# Altium PCB PCB1.PcbDoc
Units mil, origin at the board's own origin, x right, y up, seen from the top; angles counter-clockwise.
Board outline 5000 x 4000 mil, 2 copper layers (Top Layer, Bottom Layer); 43 components, 24 nets, 163 pads, 0 vias.
Unrouted connection lines stored in the file: 78.
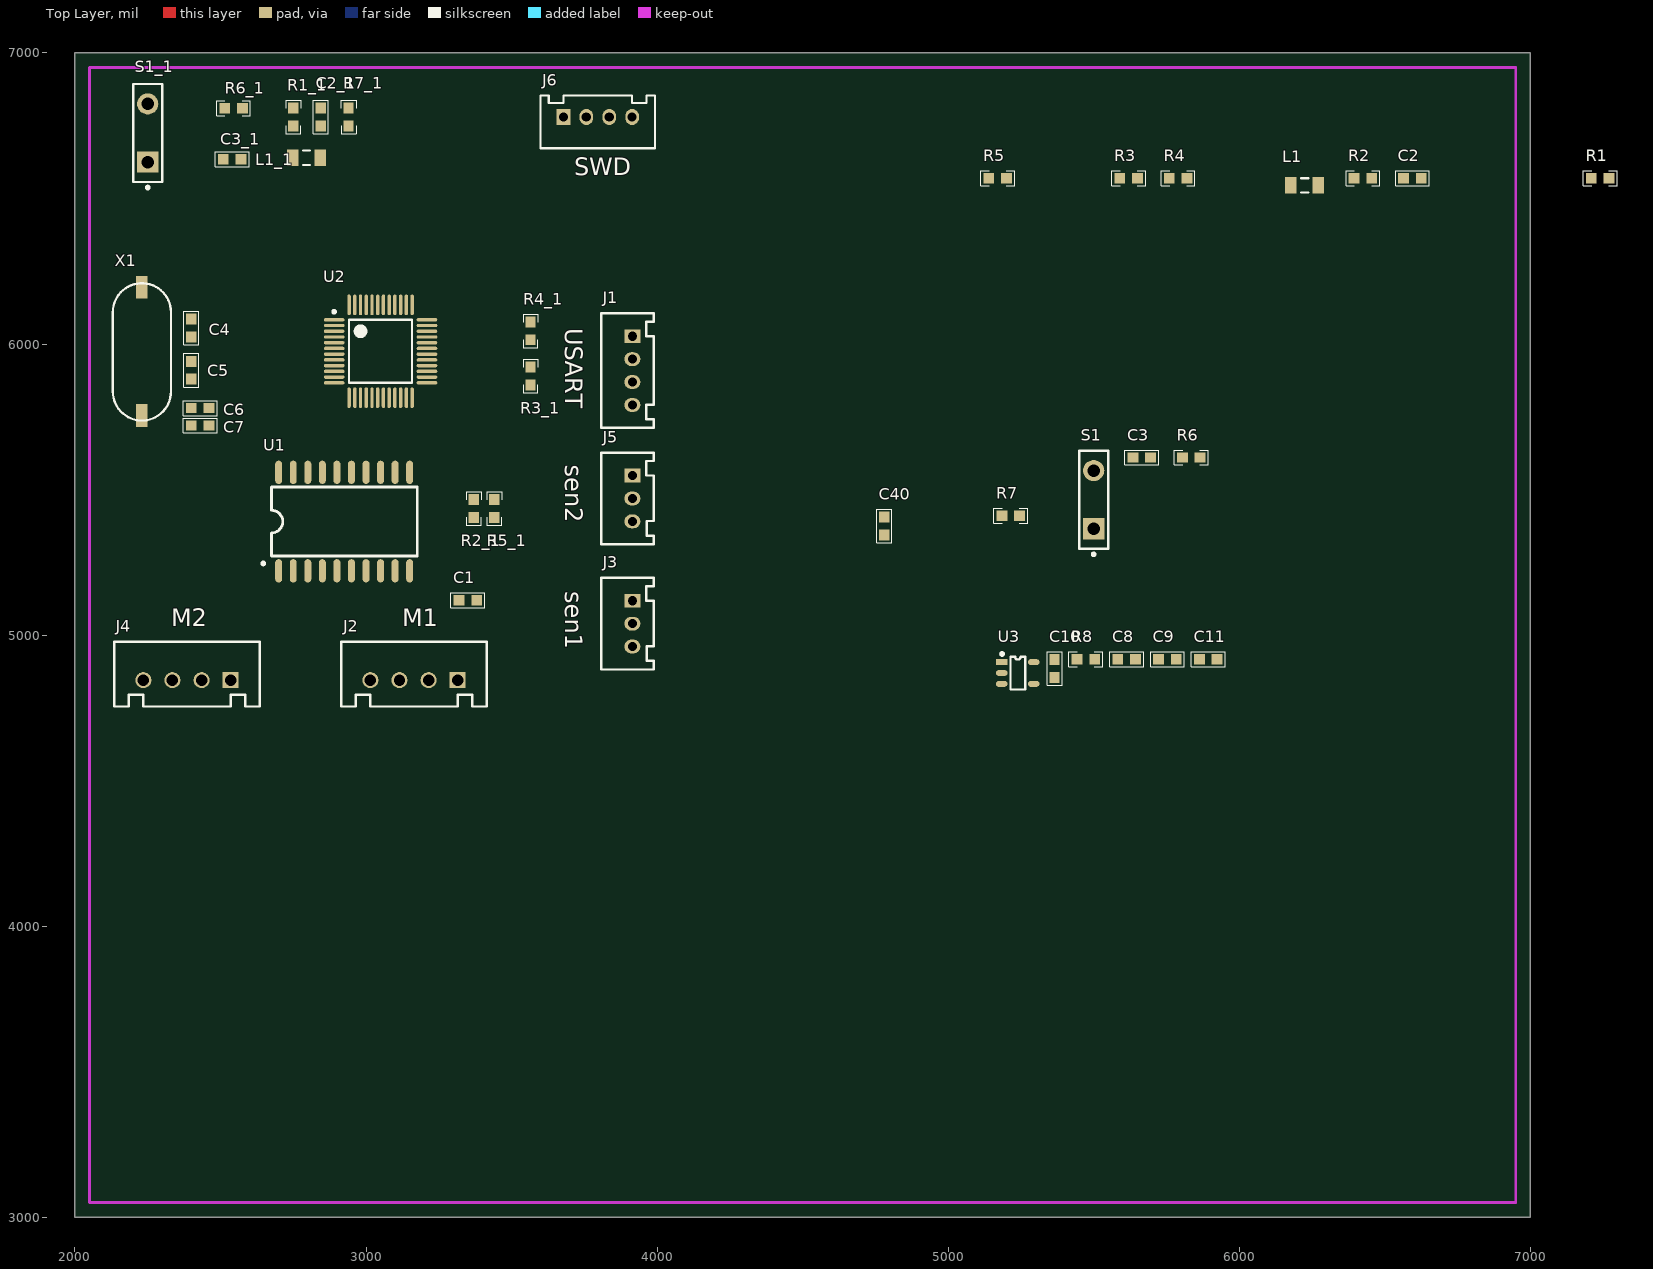
[diagram p0: Top Layer view]
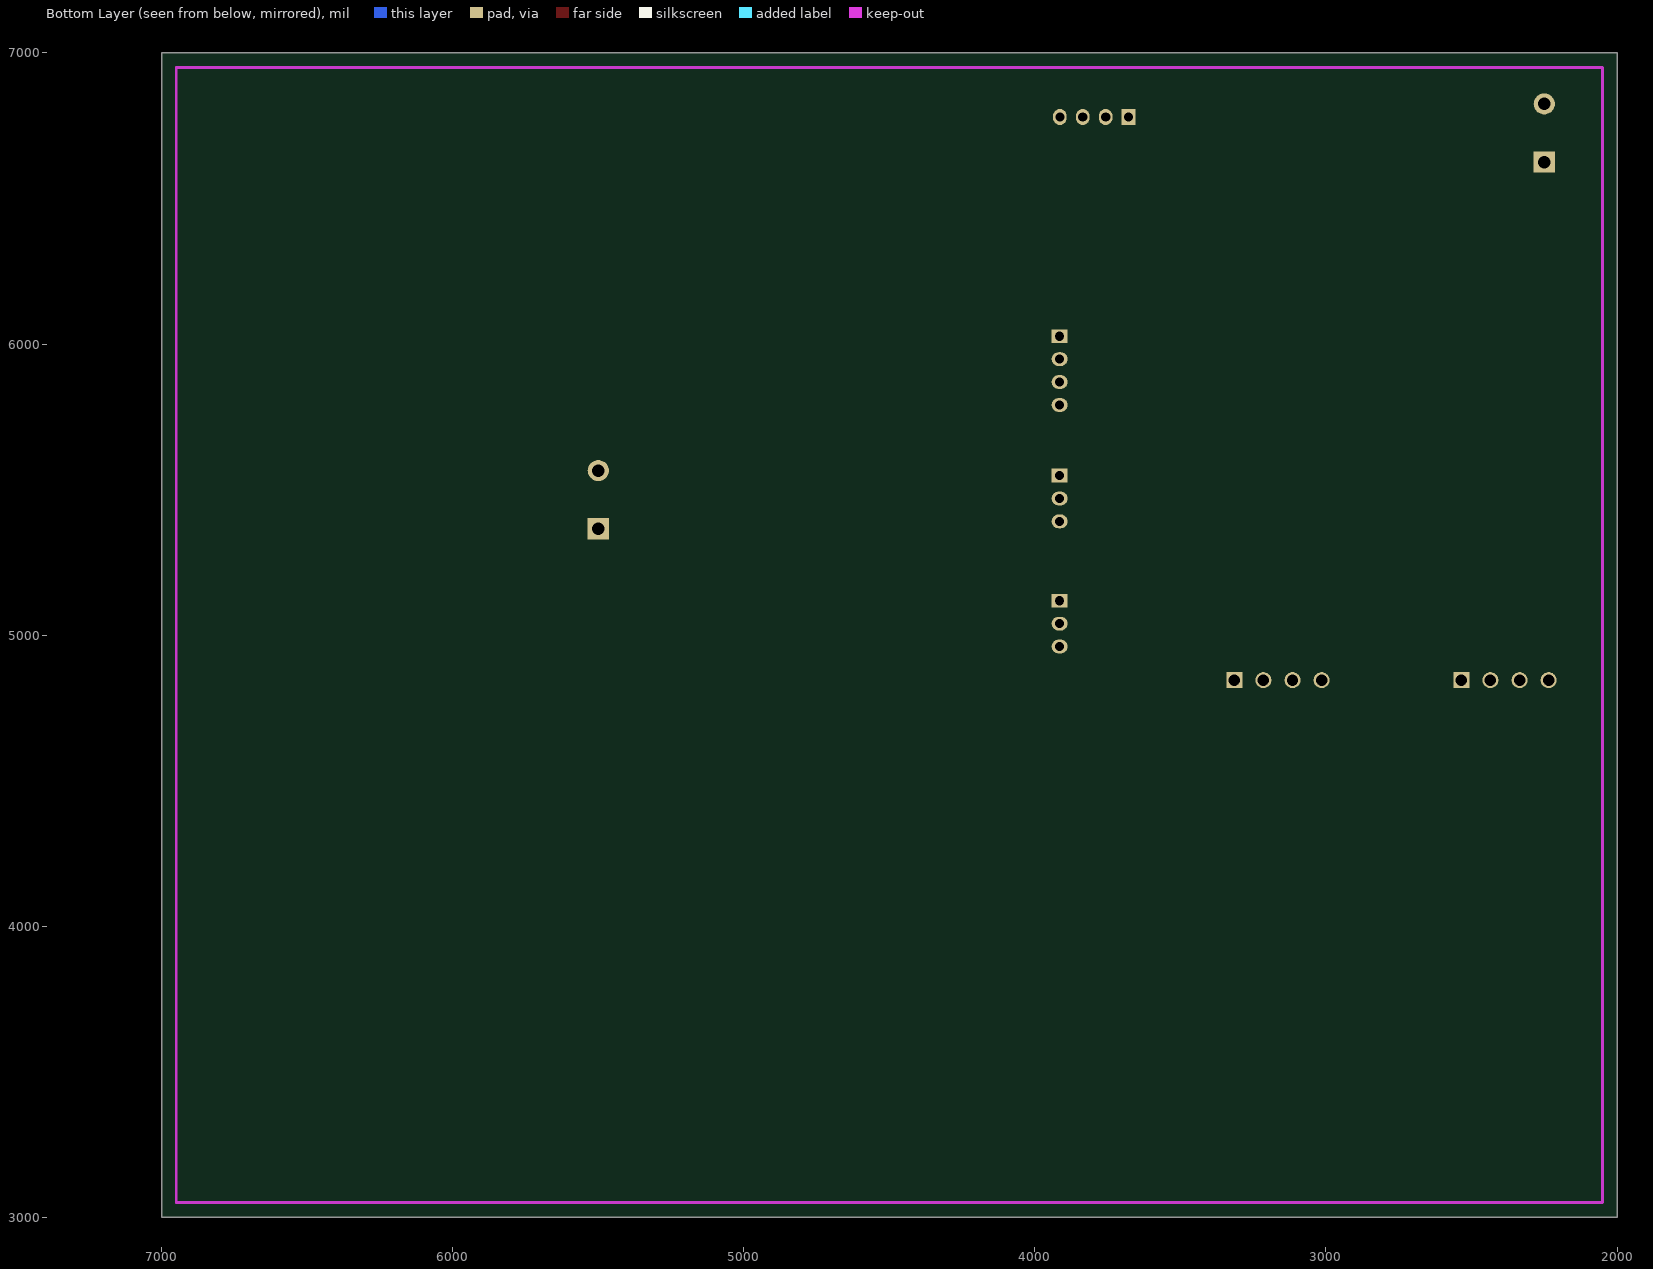
[diagram p1: Bottom Layer view, seen from below]

## Layer stack, top to bottom
Top Layer: signal copper 1.4
Dielectric: dielectric 12.6, FR-4, Dk 4.8
Bottom Layer: signal copper 1.4

## Board outline
2000,3000 7000,3000 7000,7000 2000,7000

## Design rules (kind name [scope] priority, off if disabled: settings)
Clearance [All] p1: gap=1
ComponentClearance [All] p1: gap=1 collisioncheckmode=3 verticalgap=1 showdistances=FALSE
PolygonConnect [All] p1: connectstyle=Relief reliefconductorwidth=10 reliefentries=4 polygonreliefangle="90 Angle"
RoutingVias [All] p1: holewidth=15 width=30 viastyle="Through Hole" minholewidth=28 minwidth=5 maxholewidth=28 maxwidth=50
SilkscreenOverComponentPads [All] p1: minsilkscreentomaskgap=10
SolderMaskExpansion [All] p1: expansion=4
Width [All] p1: maxlimit=8 minlimit=8 preferedwidth=8
26 further rules are at their usual default settings.

## Components (designator, comment, footprint, x,y, rotation, side; value= is the part's Value field where it differs from the comment)
C1 "C0603" C0603_M1608 3350,5120 r0 top
C2 "C0603" C0603_M1608 6595,6570 r0 top
C2_1 "C0603" C0603_M1608 2845,6780 r270 top (schematic designator C2)
C3 "C0603" C0603_M1608 5665,5610 r0 top
C3_1 "C0603" C0603_M1608 2540,6635 r0 top (schematic designator C3)
C4 "C0603" C0603_M1608 2400,6055 r90 top
C5 "C0603" C0603_M1608 2400,5910 r270 top
C6 "C0603" C0603_M1608 2430,5780 r180 top
C7 "C0603" C0603_M1608 2430,5720 r180 top
C8 "C0603" C0603_M1608 5613.24,4917.44 r0 top
C9 "C0603" C0603_M1608 5753.32,4917.44 r0 top
C10 "C0603" C0603_M1608 5365.56,4884.96 r90 top
C11 "C0603" C0603_M1608 5893.39,4917.44 r0 top
C40 "C0603" C0603_M1608 4780,5375 r90 top
J1 "PH2.0-4P" PH2.0-4P 3915,5830 r270 top
J2 "XH2.54-4P" XH2.54-4 3265,4845 r180 top
J3 "PH2.0-3P" PH2.0-3P 3915,5000 r270 top
J4 "XH2.54-4P" XH2.54-4 2485,4845 r180 top
J5 "PH2.0-3P" PH2.0-3P 3915,5430 r270 top
J6 "PH2.0-4P" PH2.0-4P 3875,6780 r0 top
L1 "LED" C2012 6225,6545 r0 top
L1_1 "LED" C2012 2795,6640 r0 top (schematic designator L1)
R1 "R0603" 0603 7240,6570 r0 top
R1_1 "R0603" 0603 2750,6780 r90 top (schematic designator R1)
R2 "R0603" 0603 6425,6570 r0 top
R2_1 "R0603" 0603 3370,5435 r90 top (schematic designator R2)
R3 "R0603" 0603 5620,6570 r0 top
R3_1 "R0603" 0603 3565,5890 r90 top (schematic designator R3)
R4 "R0603" 0603 5790,6570 r0 top
R4_1 "R0603" 0603 3565,6045 r90 top (schematic designator R4)
R5 "R0603" 0603 5170,6570 r0 top
R5_1 "R0603" 0603 3440.31,5434.96 r90 top (schematic designator R5)
R6 "R0603" 0603 5835,5610 r0 top
R6_1 "R0603" 0603 2545,6810 r180 top (schematic designator R6)
R7 "R0603" 0603 5215,5410 r0 top
R7_1 "R0603" 0603 2940,6780 r270 top (schematic designator R7)
R8 "R0603" 0603 5473.16,4917.44 r0 top
S1 "SW-PB" SPST-2 5500,5465 r90 top
S1_1 "SW-PB" SPST-2 2250,6725 r90 top (schematic designator S1)
U1 "SOP-20" SOP-20 2925,5390 r90 top
U2 "LQFP48_N" LQFP48_N 3050,5975 r0 top
U3 "XC6503D331" SOT23-5 5239,4869.76 r0 top
X1 "8M" HC-49SMD 2230,5975 r90 top

## Footprints (in the part's own frame and the unit in brackets; to place one, negate y for a bottom-side part, rotate by r counter-clockwise, add the part's x,y. Pads: shape width x height; smd on the part's side, far side on the other; paste and mask are expansions set on the pad)
0603 [mm]
  rect 0.95x0.9 smd: 1(-0.775,0) 2(0.775,0)
  silkscreen extent -1.48,-0.65 1.47,0.65
C0603_M1608 [mm] "Chip Capacitor, 2-Leads, Body 1.6x0.8mm, IPC"
  rect 0.95x0.9 smd: 1(-0.775,0) 2(0.775,0)
  silkscreen extent -1.48,-0.65 1.48,0.65
C2012 [mm] "Chip Capacitor, 2-Leads, Body 2.0x1.2mm,"
  rect 1x1.45 smd: 1(-1.2,0) 2(1.2,0)
  silkscreen extent -0.3,-0.63 0.3,0.63, body extent -0.98,-0.6 1.02,0.6, height 0.5
HC-49SMD [mm]
  rect 2x1 smd: 1(-5.588,0) 2(5.588,0)
  silkscreen extent -6.04,-2.54 5.94,2.54
LQFP48_N [mm]
  oval 1.8x0.3 smd: 1(-4.05,2.75) 2(-4.05,2.25) 3(-4.05,1.75) 4(-4.05,1.25) 5(-4.05,0.75) 6(-4.05,0.25) 7(-4.05,-0.25) 8(-4.05,-0.75) 9(-4.05,-1.25) 10(-4.05,-1.75) 11(-4.05,-2.25) 12(-4.05,-2.75) 25(4.05,-2.75) 26(4.05,-2.25) 27(4.05,-1.75) 28(4.05,-1.25) 29(4.05,-0.75) 30(4.05,-0.25) 31(4.05,0.25) 32(4.05,0.75) 33(4.05,1.25) 34(4.05,1.75) 35(4.05,2.25) 36(4.05,2.75)
  oval 0.3x1.8 smd: 13(-2.75,-4.05) 14(-2.25,-4.05) 15(-1.75,-4.05) 16(-1.25,-4.05) 17(-0.75,-4.05) 18(-0.25,-4.05) 19(0.25,-4.05) 20(0.75,-4.05) 21(1.25,-4.05) 22(1.75,-4.05) 23(2.25,-4.05) 24(2.75,-4.05) 37(2.75,4.05) 38(2.25,4.05) 39(1.75,4.05) 40(1.25,4.05) 41(0.75,4.05) 42(0.25,4.05) 43(-0.25,4.05) 44(-0.75,4.05) 45(-1.25,4.05) 46(-1.75,4.05) 47(-2.25,4.05) 48(-2.75,4.05)
  silkscreen extent -4.17,-2.75 2.75,3.57
PH2.0-3P [mm]
  rect 1.2x1.4 hole 0.8: 1(-3,0)
  oval 1.2x1.4 hole 0.8: 2(-1,0) 3(1,0)
  silkscreen extent -5,-2.72 3,1.88
PH2.0-4P [mm]
  rect 1.2x1.4 hole 0.8: 1(-5,0)
  oval 1.2x1.4 hole 0.8: 2(-3,0) 3(-1,0) 4(1,0)
  silkscreen extent -7.01,-2.72 3,1.88
SOP-20 [mil]
  oval 80x24 smd: 1(-169.29,225) 2(-169.29,175) 3(-169.29,125) 4(-169.29,75) 5(-169.29,25) 6(-169.29,-25) 7(-169.29,-75) 8(-169.29,-125) 9(-169.29,-175) 10(-169.29,-225) 11(169.29,-225) 12(169.29,-175) 13(169.29,-125) 14(169.29,-75) 15(169.29,-25) 16(169.29,25) 17(169.29,75) 18(169.29,125) 19(169.29,175) 20(169.29,225)
  silkscreen extent -149,-251 118,283
SOT23-5 [mil] "SOT23, 5-Leads, Body 3.1x3.0mm (max), Pitch 0.95mm, IPC"
  rect 40x20 smd: 1(-55,37.4)
  oval 40x20 smd: 2(-55,0) 3(-55,-37.4) 4(55,-37.4) 5(55,37.4)
  silkscreen extent -59,-57 26,70
SPST-2 [mm]
  rect 1.85x1.85 hole 1.1: 1(-2.54,0)
  round 1.85 hole 1.1: 2(2.54,0)
  silkscreen extent -4.89,-1.27 4.28,1.27
XH2.54-4 [mm]
  rect 1.4x1.4 hole 1: 1(-1.27,0)
  round 1.4 hole 1: 2(1.27,0) 3(3.81,0) 4(6.35,0)
  silkscreen extent -3.81,-3.35 8.89,2.29

## Part data
C1 C2 C2_1 C3 C3_1 C4 C5 C6 C7 C8 C9 C10 C11 C40: library part Cap, "Capacitor"
J1 J2 J4 J6: library part "Header 4", "Header"
J3 J5: library part "Header 3", "Header"
R1 R2 R3 R4 R5 R6 R7 R8: library part Res1, "R"
R1_1 R2_1 R3_1 R4_1 R5_1 R6_1 R7_1: library part Res1
S1 S1_1: "Switch"
U2: library part STM32F103C8T6, "STM32 ARM-based 32-bit MCU with 64 Kbytes Flash, 48-pin LQFP, Industrial Temp"
U3: library part XC6503Dxxx

## Nets (pads, with @x,y where several pads share a name; then routed paths per layer and width w, separated by ;. In a path a pad name is that pad's centre, name@x,y a point inside that pad or via, vN(x,y) a via of type N, cw(c..) or ccw(c..) an arc to the next point about the centre after c; other vN are vias at no path point)
3.3V: C2.1 C6.1 C7.1 C9.1 C10.2 C11.2 J3.3 J5.3 J6.1 R1.2 R2.1 R5.1 R6.1 R8.2 U2.1 U2.9 U2.24 U2.48 U3.5
5V: C1.1 C8.2 J1.1 J2.1 J4.1 U1.20 U3.1 U3.3
GND: C1.2 C2.2 C3.2 C4.1 C5.1 C6.2 C7.2 C8.1 C9.2 C10.1 C11.1 J1.4 J3.1 J5.1 J6.4 L1.2 R7.1 R8.1 S1.2 U1.1 U1.10 U1.11 U1.19 U2.8 U2.23 U2.47 U3.2
NetC4_2: C4.2 U2.5 X1.2
NetC5_2: C5.2 U2.6 X1.1
NetJ1_2: J1.2 R4.1
NetJ1_3: J1.3 R3.1
NetJ2_3: J2.3 U1.8
NetJ2_4: J2.4 U1.7
NetJ4_3: J4.3 U1.6
NetJ4_4: J4.4 U1.5
NetL1_1: L1.1 R1.1
NetR7_2: R7.2 U2.44
RST: C3.1 R6.2 S1.1 U2.7
SWCLK: J6.3 U2.37
SWDIO: J6.2 U2.34
UART1RX: R4.2 U2.31
UART1TX: R3.2 U2.30
信号1: J3.2 R2.2 U2.13
信号2: J5.2 R5.2 U2.15
电机1PWM: U1.12 U2.16
电机1方向: U1.13 U2.11
电机2PWM: U1.14 U2.17
电机2方向: U1.15 U2.12
pads on no net: C2_1.1 C2_1.2 C3_1.1 C3_1.2 C40.1 C40.2 J2.2 J4.2 L1_1.1 L1_1.2 R1_1.1 R1_1.2 R2_1.1 R2_1.2 R3_1.1 R3_1.2 R4_1.1 R4_1.2 R5_1.1 R5_1.2 R6_1.1 R6_1.2 R7_1.1 R7_1.2 S1_1.1 S1_1.2 U1.2 U1.3 U1.4 U1.9 U1.16 U1.17 U1.18 U2.2 U2.3 U2.4 U2.10 U2.14 U2.18 U2.19 U2.20 U2.21 U2.22 U2.25 U2.26 U2.27 U2.28 U2.29 U2.32 U2.33 U2.35 U2.36 U2.38 U2.39 U2.40 U2.41 U2.42 U2.43 U2.45 U2.46 U3.4

## Keep-outs
Keep-Out Layer:
  lines w10: 2050,3050 6950,3050 6950,6950 2050,6950 2050,3050

## Silkscreen, mask and mechanical layers (free items; w line width, h text height)
Top Overlay:
  text "SWD" at 3715,6580 h60
  text "USART" at 3685,6055 h60 r270
  text "sen2" at 3685,5585 h60 r270
  text "sen1" at 3685,5150 h60 r270
  text "M2" at 2330,5030 h60
  text "M1" at 3125,5030 h60
Drill Drawing:
  text ".LEGEND" at 7200,3200 h60
  text "Drill Drawing." at 7200,3100 h60

## Dimensions
2050,3050 to 6950,3050 on Mechanical 1
2050,3050 to 2050,6950 on Mechanical 1